# EAGLE board Un_GPS_old (EAGLE 6.2)
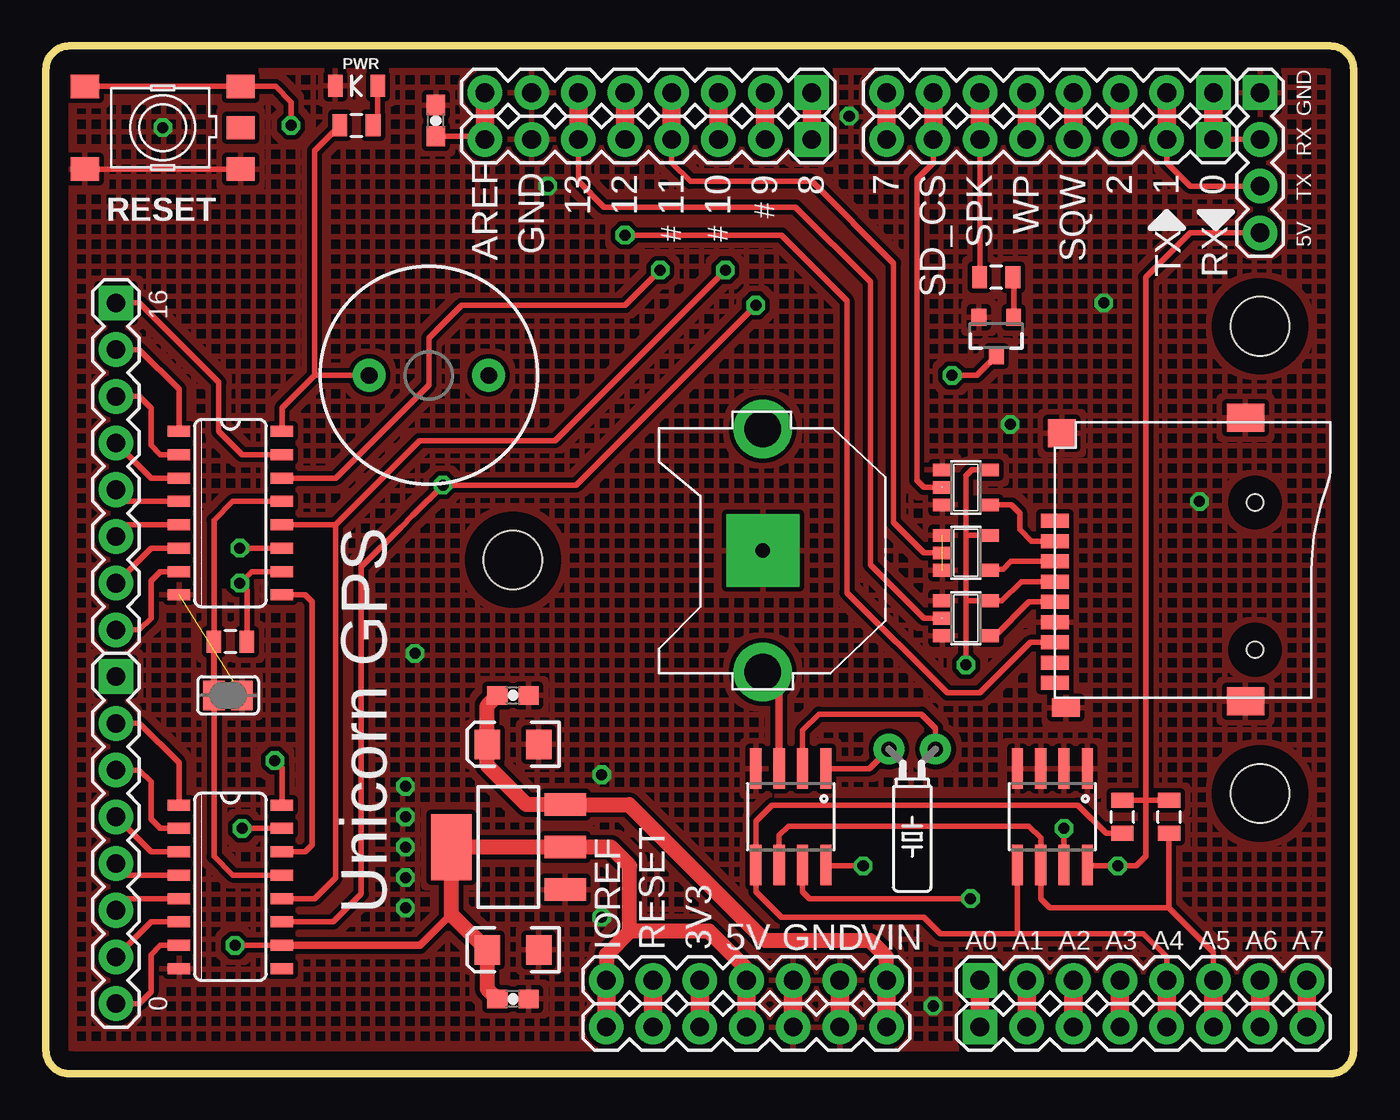
[diagram p0: board, top side]
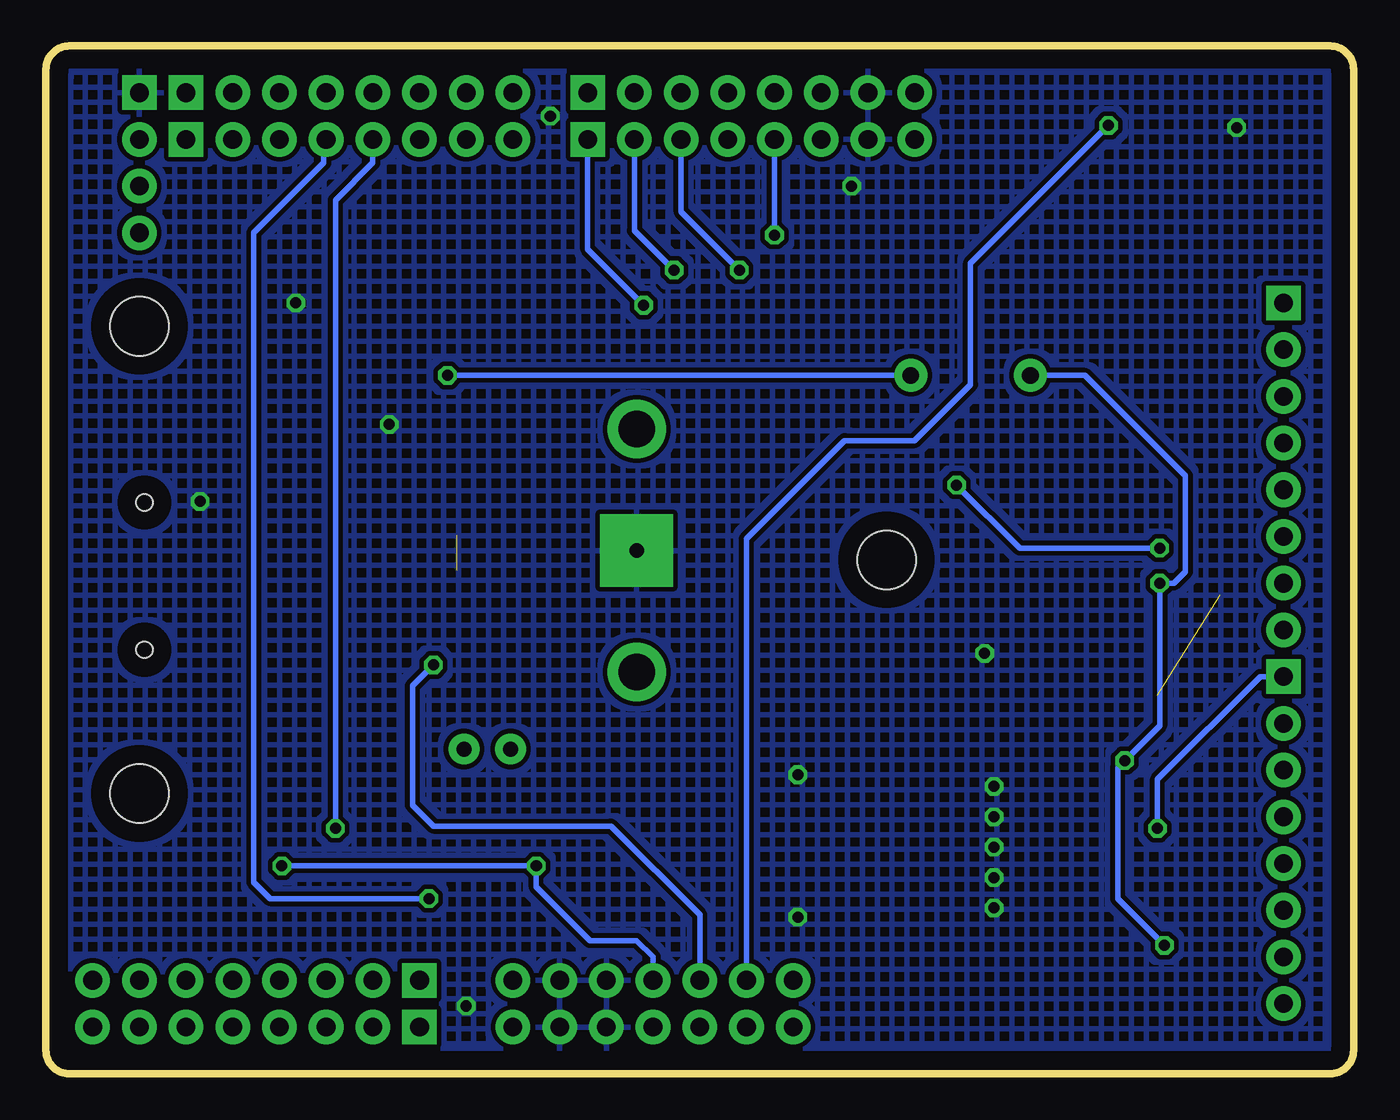
[diagram p1: board, bottom side, seen from below]

Size 71.12 x 55.88 mm. Coordinates in mm from the lower left corner, seen from the top.
Outline: 1.27,0 69.85,0 arc90 71.12,1.27 71.12,54.61 arc90 69.85,55.88 1.27,55.88 arc90 0,54.61 0,1.27 arc90 1.27,0
Copper layers (1*16): Top 0.035mm / dielectric 1.5mm / Bottom 0.035mm
Design rules: minimum track width 10mil, minimum drill 24mil, track to track 8mil, track to pad 8mil, pad to pad 8mil, via to via 8mil, smd to smd 8mil, copper to edge 40mil, drill to drill 8mil, minimum pad ring 10mil, minimum via ring 8mil, stop-mask expansion 4mil, vias tented up to drill 0mil, thermal gap 10mil
Net classes: 0 default: width 0.254 mm, clearance 0.254 mm; 1 power: width 0.61 mm, drill 0.61 mm, clearance 0.254 mm; 2 gnd: width 0.305 mm, drill 0.559 mm, clearance 0.254 mm; 3 usbvcc: width 0.508 mm, drill 0.61 mm, clearance 0.254 mm; 4 aref: width 0.406 mm, drill 0.61 mm, clearance 0.254 mm
Holes 3.2 mm at 66.04,40.64 66.04,15.24 25.4,27.94

## Footprints (pad centres in the part's own frame; a part is rotated, then mirrored left to right if it is on the bottom)
0603-CAP = smd 1.1 x 1: 1 -0.85,0; 2 0.85,0
EIA3216 = smd 1.4 x 1.6: A 1.4,0; C -1.4,0
SOT223 = smd 1.219 x 2.235: 1 -2.311,-3.099; 2 0,-3.099; 3 2.311,-3.099 | smd 3.6 x 2.2: 4 0,3.099
SO16 = smd 0.6 x 1.2: 1 -4.445,-2.8; 2 -3.175,-2.8; 3 -1.905,-2.8; 4 -0.635,-2.8; 5 0.635,-2.8; 6 1.905,-2.8; 7 3.175,-2.8; 8 4.445,-2.8; 9 4.445,2.8; 10 3.175,2.8; 11 1.905,2.8; 12 0.635,2.8; 13 -0.635,2.8; 14 -1.905,2.8; 15 -3.175,2.8; 16 -4.445,2.8
SOT23-5 = smd 0.69 x 0.99: 1 -0.95,-1.29; 2 0,-1.29; 3 0.95,-1.29; 4 0.95,1.3; 5 -0.95,1.3
9P-SMD-W/-RING = smd 1.524 x 0.762: 1 0,4.4; 2 0,3.3; 3 0,2.2; 4 0,1.1; 5 0,0; 6 0,-1.1; 7 0,-2.2; 8 0,-3.3; 9 0,-4.4 | smd 1.524 x 1.016: G1 0.6,-5.746 | smd 2.032 x 1.524: G2 10.373,-5.4; G3 10.373,10 | smd 1.524 x 1.524: G4 0.392,9.181 | hole 0.889: 10.9,-2.6; 10.9,5.4
1X08 = drill 1.016 pad 1.88 square: 1 0,0 | drill 1.016 pad 1.88: 2 2.54,0; 3 5.08,0; 4 7.62,0; 5 10.16,0; 6 12.7,0; 7 15.24,0; 8 17.78,0
1X04 = drill 1.016 pad 1.88 square: 1 0,0 | drill 1.016 pad 1.88: 2 2.54,0; 3 5.08,0; 4 7.62,0
1X07 = drill 1.016 pad 1.88: 1 0,0; 2 2.54,0; 3 5.08,0; 4 7.62,0; 5 10.16,0; 6 12.7,0; 7 15.24,0
LED-0805 = smd 0.8 x 1.2: 1 -1.154,0; 2 1.154,0
SOT23-3 = smd 0.8 x 0.9: 1 -0.95,-1; 2 0.95,-1; 3 0,1.1
0805 = smd 0.8 x 1.2: 1 -0.9,0; 2 0.9,0
BUZZER-12MM = drill 0.9 pad 1.778: + 3.25,0; - -3.25,0
SJ = smd 1.168 x 1.6: 1 -0.762,0; 2 0.762,0
SO08 = smd 0.61 x 2.21: 1 -1.905,-2.616; 2 -0.635,-2.616; 3 0.635,-2.616; 4 1.905,-2.616; 5 1.905,2.616; 6 0.635,2.616; 7 -0.635,2.616; 8 -1.905,2.616
CR1220-THM = drill 2 pad 3.175: +1 -6.604,0; +2 6.604,0 | drill 0.8 pad 3.962 square: - 0,0
TS42 = smd 1.524 x 1.27: 1 -4.229,2.25; 2 4.229,2.25; 3 -4.229,-2.25; 4 4.229,-2.25; 5 -4.229,-0.002
TC26H = drill 0.813 pad 1.676: 1 -1.27,0; 2 1.27,0

## Placement (x,y rotation side)
C1  100n  [0603-CAP]  25.4,4.06 180 top
C2  [EIA3216]  25.4,17.91 180 top
C3  [EIA3216]  25.4,6.73 180 top
C4  100n  [0603-CAP]  25.4,20.57 0 top
C11  100n  [0603-CAP]  21.21,51.82 90 top
IC1  LD1117-5.0  [SOT223]  25.15,12.32 90 top
IC2  74LS595D  [SO16]  10.03,30.48 270 top
IC3  74LS595D  [SO16]  10.03,10.16 270 top
IC4  74LVC1G125DBV  [SOT23-5]  50.04,28.32 270 top
IC5  74LVC1G125DBV  [SOT23-5]  50.04,24.77 270 top
IC6  74LVC1G125DBV  [SOT23-5]  50.04,31.88 270 top
J2  [9P-SMD-W/-RING]  54.86,25.65 0 top
JP1  [1X08]  50.8,5.08 0 top
JP2  [1X04]  66.04,53.34 270 top
JP3  [1X08]  63.5,53.34 180 top
JP4  [1X08]  50.8,2.54 0 top
JP5  [1X07]  45.72,2.54 180 top
JP6  [1X08]  63.5,50.8 180 top
JP7  [1X08]  3.81,41.91 270 top
JP8  [1X08]  41.66,53.34 180 top
JP9  [1X07]  45.72,5.08 180 top
JP10  [1X08]  41.66,50.8 180 top
JP11  [1X08]  3.81,21.59 270 top
ON  [LED-0805]  16.89,53.72 180 top
Q1  9013  [SOT23-3]  51.69,40.13 180 top
R1  2.2k  [0805]  61.09,13.97 90 top
R2  1k  [0805]  51.69,43.31 180 top
R3  2.2k  [0805]  58.55,13.97 90 top
R4  1k  [0805]  16.89,51.56 0 top
R5  10k  [0805]  10.03,23.5 180 top
SG1  BUZZERPTH  [BUZZER-12MM]  20.83,37.97 180 top
SJ1  [SJ]  9.91,20.57 180 top
U$1  DS1307SO8  [SO08]  40.51,13.97 180 top
U$5  [CR1220-THM]  38.99,28.45 90 top
U$7  EEPROM-I2CSMD  [SO08]  54.74,13.97 180 top
U$10  TS42  [TS42]  6.35,51.44 180 top
Y1  32.768k  [TC26H]  47.12,17.65 180 top

## Library data of the parts
C1-C4 C11 IC1 JP3 JP6 JP8 JP10 ON = 1SparkFun
IC2 IC3 JP1 JP2 JP4 JP5 JP7 JP9 JP11 Q1 R1-R5 SG1 U$1 U$7 U$10 Y1 = 2SparkFun
IC4-IC6 = 74xx-little-us
J2 = SeeedStudio-Connector
SJ1 = jumper
U$5 = 1adafruit

## Nets
3.3V: IC4.5 IC5.5 IC6.5 J2.4 JP5.5 JP9.5
5V: C1.2 C3.A IC1.2 IC1.4 IC2.10 IC2.16 IC3.10 IC3.16 JP2.4 JP5.4 JP5.7 JP9.4 JP9.7 R1.2 R3.2 R4.1 R5.1 SG1.+ U$1.8 U$7.8
A0: JP1.1 JP4.1
AREF: C11.1 JP8.8 JP10.8
GND: C1.1 C2.C C3.C C4.2 C11.2 IC1.1 IC2.8 IC3.8 IC4.1 IC4.3 IC5.1 IC5.3 IC6.1 IC6.3 J2.6 J2.G1 J2.G2 J2.G3 J2.G4 JP2.1 JP5.2 JP5.3 JP8.7 JP9.2 JP9.3 JP10.7 ON.2 Q1.2 SJ1.1 U$1.4 U$5.- U$7.1 U$7.2 U$7.3 U$7.4 U$10.1 U$10.2
IO8: IC2.11 IC3.11 JP8.1 JP10.1
IO9: IC2.12 IC3.12 JP8.2 JP10.2
IO10: IC2.14 JP8.3 JP10.3
MISO: J2.7 JP8.5 JP10.5
MOSI: IC4.2 JP8.4 JP10.4
MOSI3: IC4.4 J2.3
N$1: U$1.1 Y1.2
N$2: U$1.2 Y1.1
N$3: U$1.3 U$5.+1
N$4: Q1.3 SG1.-
N$5: Q1.1 R2.1
N$6: IC2.9 IC3.14
N$7: IC2.13 IC3.13 R5.2 SJ1.2
N$10: IC2.15 JP7.1
N$11: IC2.1 JP7.2
N$12: JP1.7 JP4.7
N$13: JP1.8 JP4.8
N$14: IC2.2 JP7.3
N$15: IC2.3 JP7.4
N$19: IC2.4 JP7.5
N$20: IC2.5 JP7.6
N$21: IC2.6 JP7.7
N$22: IC2.7 JP7.8
N$23: IC3.15 JP11.1
N$24: JP3.3 JP6.3
N$29: JP3.8 JP6.8
N$30: IC3.1 JP11.2
N$31: JP1.2 JP4.2
N$32: JP1.3 JP4.3
N$33: JP1.4 JP4.4
N$34: ON.1 R4.2
N$35: IC3.2 JP11.3
N$36: IC3.3 JP11.4
N$37: IC3.4 JP11.5
N$38: JP5.6 JP9.6 U$10.3 U$10.4
N$39: IC3.5 JP11.6
N$40: IC3.6 JP11.7
N$41: IC3.7 JP11.8
RXD: JP2.2 JP3.1 JP6.1
SCK: IC5.2 JP8.6 JP10.6
SCK3: IC5.4 J2.5
SCL: JP1.6 JP4.6 R1.1 U$1.6 U$7.6
SD_CS: IC6.2 JP3.7 JP6.7
SDA: JP1.5 JP4.5 R3.1 U$1.5 U$7.5
SEN3: IC6.4 J2.2
SPK: JP3.6 JP6.6 R2.2
SQW: JP3.4 JP6.4 U$1.7
TXD: JP2.3 JP3.2 JP6.2
VIN: C2.A C4.1 IC1.3 JP5.1 JP9.1
WP: JP3.5 JP6.5 U$7.7

## Tracks (layer width: path | path; a pad name or v marks a point on that pad's centre or on a via)
3.3V  (via drill 0.6)
  Top 0.305: 50.04,29.34 50.04,32.51 50.35,32.83 IC6.5 | IC4.5 50.1,29.27 50.04,29.34 | v50.04,22.23 50.04,25.78 | 50.04,25.78 50.04,29.34 | 50.04,25.78 50.1,25.71 IC5.5 52,25.71 53.04,26.75 J2.4
  Top 1.016: JP5.5 JP9.5
  Bottom 0.305: v50.04,22.23 51.18,21.08 51.18,14.61 50.04,13.46 40.39,13.46 35.56,8.64 JP9.5
5V  (via drill 0.6)
  Top 0.305: IC3.10 v10.29,6.99 | IC2.10 11.18,27.3 v10.54,26.67 10.93,26.28 R5.1 | IC3.16 12.83,16.63 v12.45,17.02 | IC2.16 12.83,36.2 14.61,37.97 | R3.2 59.82,14.87 | 59.82,14.87 R1.2 | 59.82,14.87 59.82,11.81 59.31,11.3 v58.29,11.3 56.69,11.3 U$7.8 | U$1.8 42.42,11.3 v44.45,11.3 | JP2.4 62.23,45.72 59.82,43.31 59.82,14.87 | 14.61,37.97 SG1.+ | 14.61,37.97 14.61,50.18 R4.1
  Top 0.406: C3.A 23.49,7.24 | IC3.10 20.35,6.99 22.05,8.68
  Top 0.813: C1.2 24,4.61 C3.A 22.05,8.68 IC1.4 IC1.2 30.73,12.32 31.75,11.3 31.75,7.75 | JP9.4 38.1,5.71 36.07,7.75 31.75,7.75 | 31.75,7.75 30.48,6.48 JP9.7
  Top 1.016: JP5.7 JP9.7 | JP5.4 JP9.4
  Bottom 0.305: v10.29,6.99 12.83,9.53 12.83,16.64 v12.45,17.02 10.54,18.92 v10.54,26.67 9.78,26.67 9.14,27.3 9.14,32.51 14.61,37.97 SG1.+ | v58.29,11.3 v44.45,11.3 44.45,10.16 41.53,7.24 38.99,7.24 38.1,6.35 JP9.4
A0
  Top 1.016: JP1.1 JP4.1
AREF
  Top 0.305: C11.1 23.88,50.97 JP10.8
  Top 1.016: JP8.8 JP10.8
GND  (via drill 0.6)  (2 unrouted)
  Top 0.305: U$10.2 U$10.1
  Top 1.016: JP5.2 JP9.2 | JP5.3 JP9.3
  other vias: 27.31,48.26 57.53,41.91 62.74,31.11 52.45,35.31 43.69,52.07 6.35,51.44 20.07,22.86 48.26,3.68 19.56,13.97 19.56,12.32 19.56,10.67 19.56,15.62 19.56,9.02 30.23,8.51 30.23,16.26
  pour Top (hatched): 0,55.88 71.12,55.88 71.12,0 0,0
  pour Bottom (hatched): 0,55.88 71.12,55.88 71.12,0 0,0
IO8  (via drill 0.6)
  Top 0.305: IC2.11 v10.54,28.57 | v38.61,41.78 28.83,32 v21.59,32 19.94,30.35 19.3,29.72 17.14,27.56 17.14,9.78 15.62,8.26 IC3.11
  Top 1.016: JP8.1 JP10.1
  Bottom 0.305: v38.61,41.78 41.66,44.83 JP10.1 | v10.54,28.57 18.16,28.57 v21.59,32
IO9  (via drill 0.6)
  Top 0.305: v36.96,43.69 27.69,34.42 20.32,34.42 15.75,29.84 | IC3.12 14.61,9.53 15.75,10.67 15.75,29.84 | IC2.12 15.75,29.84
  Top 1.016: JP8.2 JP10.2
  Bottom 0.305: JP10.2 39.12,45.85 v36.96,43.69
IO10  (via drill 0.6)
  Top 0.305: v33.4,43.69 31.5,41.78 22.61,41.78 20.83,40.01 20.83,37.47 15.75,32.38 IC2.14
  Top 1.016: JP8.3 JP10.3
  Bottom 0.305: v33.4,43.69 36.58,46.86 JP10.3
MISO  (via drill 0.6)
  Top 0.305: v31.5,45.59 40,45.59 43.56,42.04 43.56,26.16 49.02,20.7 50.8,20.7 53.55,23.45 J2.7
  Top 1.016: JP8.5 JP10.5
  Bottom 0.305: v31.5,45.59 JP10.5
MOSI
  Top 0.305: IC4.2 47.75,28.32 46.1,29.97 46.1,44.07 41.66,48.51 35.05,48.51 34.04,49.53 JP10.4
  Top 1.016: JP8.4 JP10.4
MOSI3
  Top 0.305: J2.3 52.49,27.85 52.07,27.43 51.4,27.43 IC4.4
N$1
  Top 0.305: U$1.1 44.78,16.59 Y1.2
N$2
  Top 0.305: Y1.1 48.39,18.8 47.62,19.56 42.04,19.56 41.15,18.67 U$1.2
N$3
  Top 0.406: U$1.3 39.88,20.95 U$5.+1
N$4  (via drill 0.6)
  Top 0.305: v49.28,37.97 50.63,37.97 Q1.3
  Bottom 0.305: SG1.- v49.28,37.97
N$5
  Top 0.305: R2.1 52.64,43.26 Q1.1
N$6
  Top 0.305: IC3.14 14.1,12.06 14.48,12.45 14.48,25.65 14.1,26.04 IC2.9
N$7
  Top 0.305: IC2.13 10.16,31.11 9.14,30.1 SJ1.2 | SJ1.2 9.14,11.81 10.16,10.79 IC3.13 | R5.2 9.13,20.59 SJ1.2
N$10
  Top 0.305: IC2.15 10.67,33.66 9.4,34.92 9.4,37.59 5.08,41.91 JP7.1
N$11
  Top 0.305: IC2.1 7.23,37.22 5.08,39.37 JP7.2
N$12
  Top 1.016: JP1.7 JP4.7
N$13
  Top 1.016: JP1.8 JP4.8
N$14
  Top 0.305: IC2.2 6.22,33.66 5.72,34.16 5.72,36.2 5.08,36.83 JP7.3
N$15
  Top 0.305: IC2.3 5.72,32.38 JP7.4
N$19
  Top 0.305: IC2.4 4.44,31.11 JP7.5
N$20
  Top 0.305: IC2.5 4.44,29.84 JP7.6
N$21
  Top 0.305: IC2.6 5.72,28.57 JP7.7
N$22
  Top 0.305: IC2.7 6.22,27.3 5.72,26.8 5.72,24.77 5.08,24.13 JP7.8
N$23  (via drill 0.6)
  Top 0.305: IC3.15 v10.67,13.34
  Bottom 0.305: JP11.1 5.08,21.59 10.67,16 v10.67,13.34
N$24
  Top 1.016: JP3.3 JP6.3
N$29
  Top 1.016: JP3.8 JP6.8
N$30
  Top 0.305: IC3.1 7.23,16.9 5.08,19.05 JP11.2
N$31
  Top 1.016: JP4.2 JP1.2
N$32
  Top 1.016: JP1.3 JP4.3
N$33
  Top 1.016: JP4.4 JP1.4
N$34
  Top 0.305: R4.2 18.05,51.56 ON.1
N$35
  Top 0.305: IC3.2 6.22,13.34 5.72,13.84 5.72,15.88 5.08,16.51 JP11.3
N$36
  Top 0.305: IC3.3 5.72,12.06 JP11.4
N$37
  Top 0.305: IC3.4 4.44,10.79 JP11.5
N$38  (via drill 0.6)
  Top 0.305: U$10.4 U$10.3 12.48,53.69 13.33,52.83 v13.33,51.56
  Top 1.016: JP5.6 JP9.6
  Bottom 0.305: JP9.6 33.02,29.08 27.69,34.42 23.88,34.42 20.83,37.47 20.83,44.07 v13.33,51.56
N$39
  Top 0.305: IC3.5 4.44,9.53 JP11.6
N$40
  Top 0.305: IC3.6 5.72,8.26 JP11.7
N$41
  Top 0.305: IC3.7 6.22,6.99 5.72,6.48 5.72,4.45 5.08,3.81 JP11.8
RXD
  Top 0.305: JP6.1 JP2.2
  Top 1.016: JP3.1 JP6.1
SCK
  Top 0.305: IC5.2 47.75,24.77 44.83,27.69 44.83,43.05 40.77,47.12 30.35,47.12 28.96,48.51 JP10.6
  Top 1.016: JP8.6 JP10.6
SCK3
  Top 0.305: J2.5 53.47,25.65 51.63,23.82 IC5.4
SCL
  Top 0.305: U$1.6 39.88,12.95 40.39,13.46 53.47,13.46 54.1,12.83 U$7.6 54.1,9.53 54.61,9.02 61.09,9.02 | 61.09,9.02 R1.1 | JP1.6 63.5,6.6 61.09,9.02
  Top 1.016: JP1.6 JP4.6
SD_CS
  Top 0.305: IC6.2 47.75,31.88 47.37,32.26 47.37,48.64 48.26,49.53 JP6.7
  Top 1.016: JP3.7 JP6.7
SDA
  Top 0.305: R3.1 57.67,13.07 56.13,14.61 39.5,14.61 38.61,13.72 U$1.5 38.61,9.91 40,8.51 47.75,8.51 48.64,7.62 52.83,7.62 | JP1.5 60.96,6.35 59.69,7.62 52.83,7.62 | U$7.5 52.83,7.62
  Top 1.016: JP1.5 JP4.5
SEN3
  Top 0.305: J2.2 53.6,28.95 52.96,29.59 52.96,30.48 52.51,30.93 IC6.4
SPK
  Top 0.305: JP6.6 R2.2
  Top 1.016: JP3.6 JP6.6
SQW  (via drill 0.6)
  Top 0.305: U$1.7 41.15,9.91 41.53,9.53 v50.29,9.53
  Top 1.016: JP3.4 JP6.4
  Bottom 0.305: JP6.4 56.01,50.67 56.01,49.53 59.82,45.72 59.82,10.41 58.93,9.53 v50.29,9.53
TXD
  Top 0.305: JP6.2 60.96,49.53 62.23,48.26 JP2.3
  Top 1.016: JP3.2 JP6.2
VIN
  Top 0.813: C4.1 24,20.02 C2.A 24,16.76 26.14,14.63 IC1.3 31.72,14.63 39.12,7.24 44.83,7.24 45.72,6.35 JP9.1
  Top 1.016: JP5.1 JP9.1
WP  (via drill 0.6)
  Top 0.305: U$7.7 v55.37,13.34
  Top 1.016: JP3.5 JP6.5
  Bottom 0.305: v55.37,13.34 55.37,47.5 53.34,49.53 JP6.5

## Text on the board
tPlace: GND | RX | 13 | 12 | 11 | 10 | 9 | 8 | 7 | SD_CS | SPK | WP | SQW | 2 | 1 | 0 | TX | 5V | 16 | Unicorn GPS | 0
tNames: PWR | AREF | GND | RESET | # | # | # | TX | RX | IOREF | RESET | 3V3 | 5V | GND | VIN | A0 | A1 | A2 | A3 | A4 | A5 | A6 | A7